# Altium PCB LMAT_AMT_V2.PcbDoc (part 2 of 2)
Units mil, origin at the board's own origin, x right, y up, seen from the top; angles counter-clockwise.
Board outline 1437.01 x 1604.33 mil, 2 copper layers (Top Layer, Bottom Layer), stack 62.192 mil thick; 98 components, 45 nets, 234 pads, 118 vias.
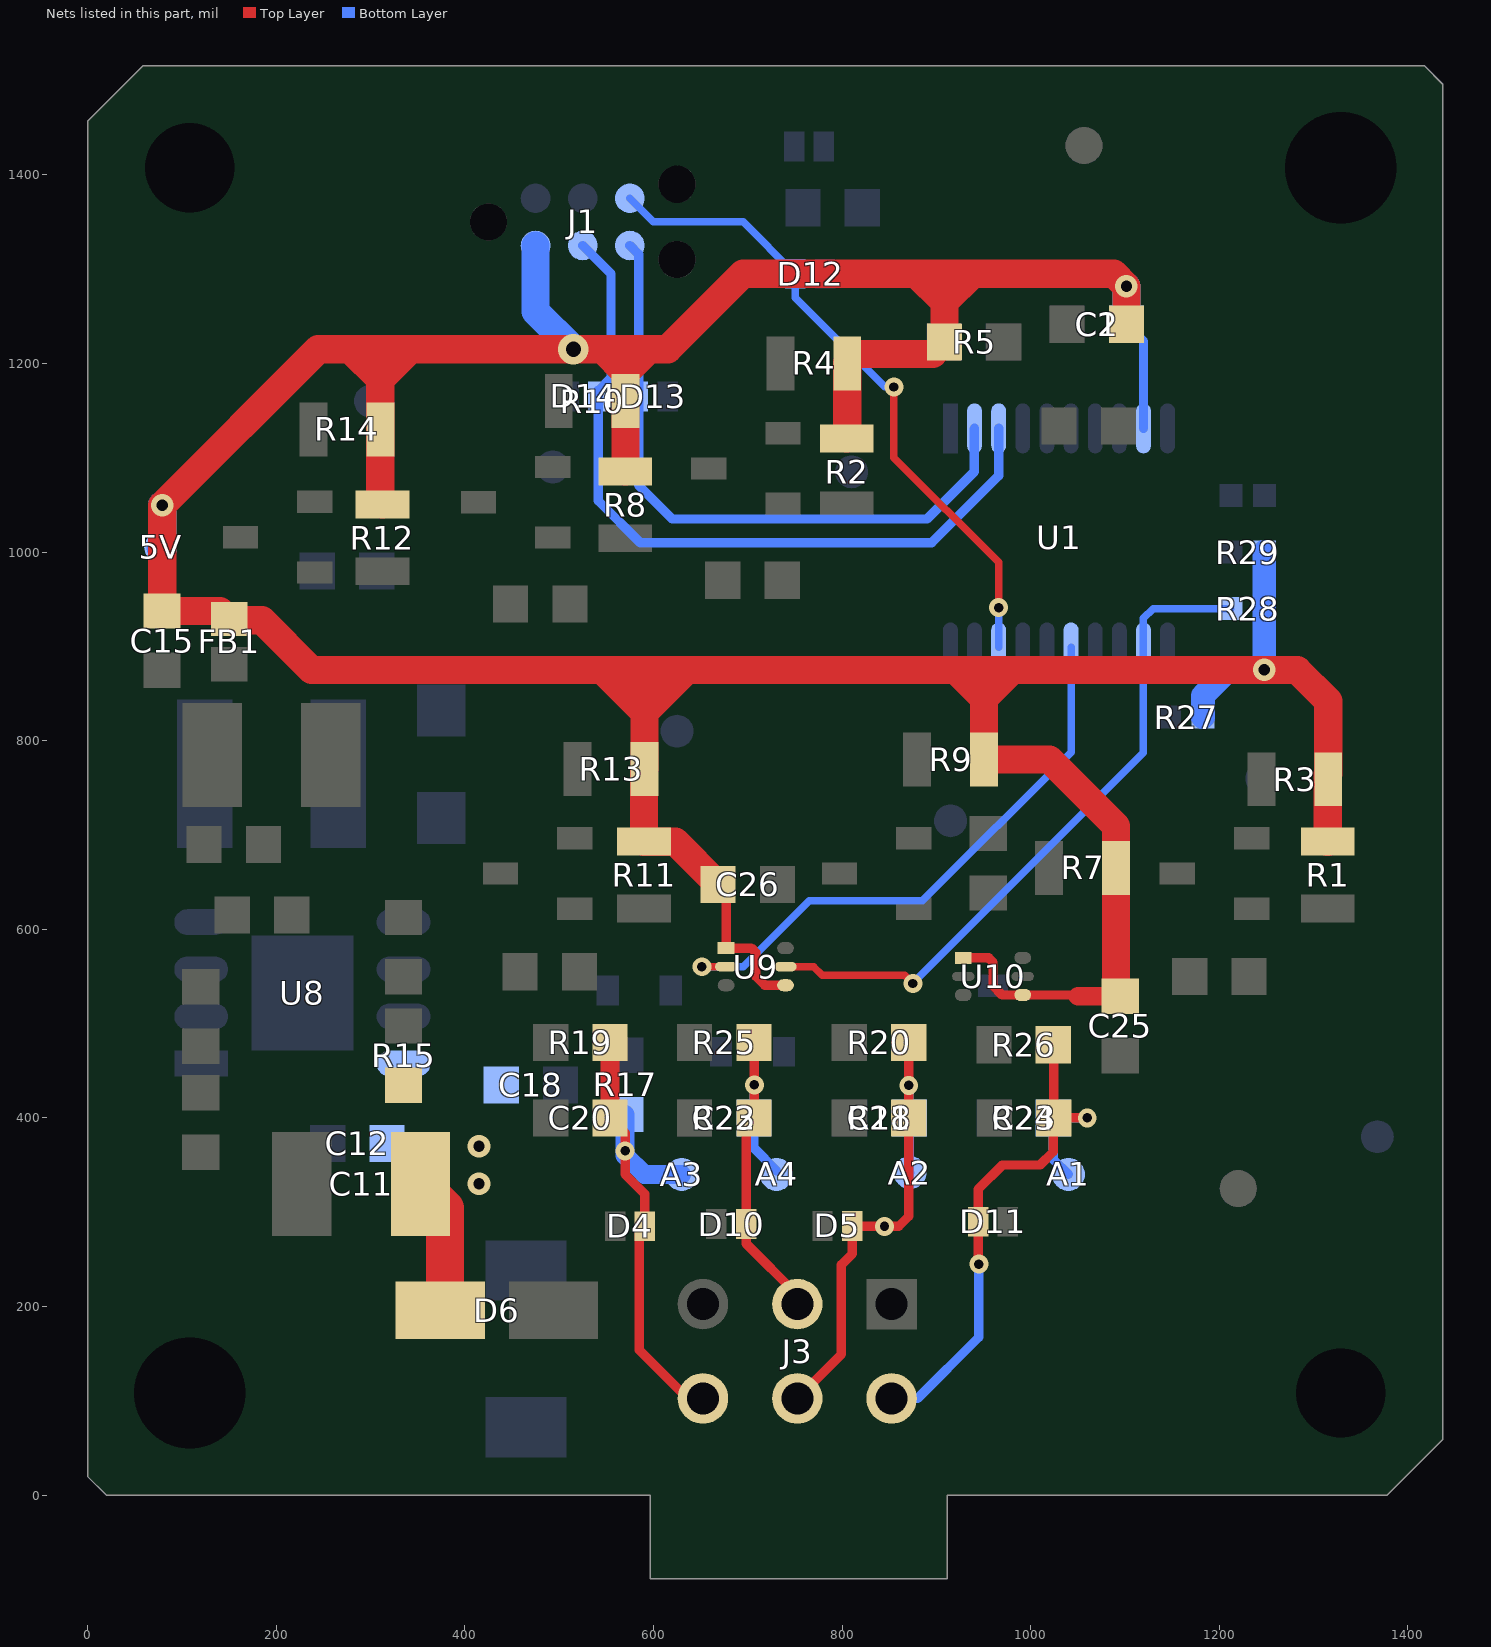
[diagram p2: the nets of this part, all layers, seen from the top]

## Via types
v1: diameter 20, hole 10, Top Layer to Bottom Layer, tented both sides, 66 vias
v2: diameter 24, hole 12, Top Layer to Bottom Layer, tented both sides, 49 vias
v3: diameter 32, hole 16, Top Layer to Bottom Layer, tented both sides, 3 vias

## Nets (pads, with @x,y where several pads share a name; then routed paths per layer and width w, separated by ;. In a path a pad name is that pad's centre, name@x,y a point inside that pad or via, vN(x,y) a via of type N, cw(c..) or ccw(c..) an arc to the next point about the centre after c; other vN are vias at no path point) (continued)
S3: R28.1 U1.12 U9.5 | length 727.8
  Top Layer w8: U9.5@740,560.31 769.69,560.31 779,551 866.5,551 v1(875,542.5)
  Bottom Layer w8: v1(875,542.5) 1119.57,787.07 U1.12@1119.57,898.86 1119.57,929.57 1130,940 R28.1@1212.28,940
S4: U1.15 U9.2 | length 622.5
  Top Layer w8: v1(651.31,560.31) U9.2@677.01,560.31
  Bottom Layer w8: v1(651.31,560.31) 695.31,560.31 765,630 885,630 1042.8,787.8 U1.15@1042.8,898.86
SIGNAL1: A1.1 C23.2 D11.2 J3.4 R24.2 R26.1 | length 625.1
  Top Layer w10: v1(945,245) 944.25,245.75 D11.2@944.25,290 944.25,324.25 970,350 1010,350 1024,364 1024,400 C23.2@1024.5,400 ; R26.1@1024,477.5 1024.5,477 C23.2@1024.5,400 ; v1(1060,400) C23.2@1024.5,400
  Bottom Layer w10: J3.4@852.5,102.5 880.09,102.5 945,167.41 v1(945,245) ; A1.1@1040,340 1024,356 R24.2@1024,400 v1(1060,400)
SIGNAL2: A2.1 C21.2 D5.2 J3.5 R18.2 R20.1 | length 547.3
  Top Layer w10: J3.5@752.5,102.5 799.27,149.27 799.27,244.27 810.75,255.75 810.75,285 v1(845,285) 860,285 870.75,295.75 870.75,399.95 C21.2@870.69,400 R20.1@870.69,479.2
  Bottom Layer w10: R18.2@870.75,399.95 v1(870.75,434.44) ; R18.2@871.5,400 871.5,342.5 A2.1@872,342
SIGNAL3: A3.1 C20.2 D4.2 J3.6 R17.2 R19.1 | length 544.3
  Top Layer w10: C20.2@554,400 570,384 v1(570,365) 570,340 590.75,319.25 D4.2@590.75,285 585,279.25 585,153.86 636.36,102.5 J3.6@652.5,102.5
  Top Layer w20: C20.2@554,400 R19.1@554,480
  Bottom Layer w20: R17.2@570,403.5 v1(570,365) 570,360 590,340 A3.1@630,340
SIGNAL4: A4.1 C22.2 D10.2 J3.2 R23.2 R25.1 | length 404.9
  Top Layer w10: R25.1@706.5,480 707,479.5 v1(707,435) 707,400.5 C22.2@706.5,400 698.25,391.75 D10.2@698.25,287.43 698.25,266.75 752.5,212.5 J3.2@752.5,202.5
  Bottom Layer w10: v1(707,435) 707,400.5 R23.2@706.5,400 706.5,367.96 A4.1@730.45,344
SWIM: D12.2 J1.5 U1.18 | length 699.9
  Top Layer w8: v1(855,1175) 855,1100 966.02,988.98 v1(966.02,941)
  Bottom Layer w8: J1.5@575,1375 600,1350 695,1350 750,1295 D12.2@750.45,1295 750.45,1269.55 845,1175 v1(855,1175) ; U1.18@966.02,898.86 v1(966.02,941)
UART_RX: D14.2 J1.4 U1.3 | length 811.4
  Bottom Layer w10: J1.4@525,1325 555,1295 555,1184.6 541.89,1171.5 541.5,1171.5 D14.2@541.5,1165 541.5,1054.26 585.76,1010 895,1010 966.02,1081.02 U1.3@966.02,1131.14
UART_TX: D13.2 J1.6 U1.2 | length 695.7
  Bottom Layer w10: J1.6@575,1325 584.25,1315.75 584.25,1070.75 620,1035 890,1035 940,1085 940,1130.71 U1.2@940.43,1131.14
VCC_5V: 5V.1 C1.1 C2.2 C15.1 C25.1 C26.1 FB1.2 J1.2 R1.1 R2.1 R3.1 R4.1 R5.2 R7.1 R8.1 R9.1 R10.1 R11.1 R12.1 R13.1 R14.1 R27.2 R28.2 R29.2 U1.9 U9.1 U9.4 U10.1 U10.4 | length 5364.8
  Top Layer w10: C26.1@668.5,647.5 677.01,639 U9.1@677.01,580 703.82,580 708.5,575.32 708.5,550.32 718.19,540.63 U9.4@740,540.63 ; U10.1@928.5,569.68 955.32,569.68 960,565 960,540 969.69,530.31 U10.4@991.5,530.31 1048.68,530.31 1050,529
  Top Layer w20: 1050,529 C25.1@1095,529
  Top Layer w30: 310,1215 278.36,1215 ; R12.1@312.5,1050.43 310.43,1052.5 R14.1@310.43,1130 310.43,1182.93 ; 545.86,1214.57 570.43,1190 ; R8.1@570,1085.43 570.43,1085.87 R10.1@570.43,1160 570.43,1190 ; R13.1@590,769.57 R11.1@590,692.93 623.07,692.93 C26.1@668.5,647.5 ; R13.1@590.43,770 590.43,830 ; R2.1@805,1120.43 805.43,1120.87 R4.1@805.43,1200 815.43,1210 896,1210 R5.2@908.5,1222.5 908.5,1265 ; C25.1@1093.68,530.31 1090.43,533.56 1090.43,709.57 1020,780 R9.1@950.43,780 950.43,845 ; C1.1@1101.5,1241.5 v2(1101.5,1281.64) 1088.13,1295 938.5,1295 ; R1.1@1315,692.93 1315,764.57 1315.43,765 1315.43,842.07 1282.5,875 980.43,875 ; 278.36,1215 244.5,1215 v2(79,1049.5) C15.1@79,937.5 140.13,937.5 150,927.63 184.87,927.63 237.5,875 545.43,875 ; 278.36,1215 310.43,1182.93 ; 310.43,1182.93 342.5,1215 ; 310.43,1182.93 310.43,1215 342.5,1215 ; 342.5,1215 v3(515,1215) 570.43,1215 ; 545.43,875 590.43,830 ; 545.43,875 590,875 ; 570.43,1190 570.43,1215 ; 570.43,1190 595,1214.57 595,1215 ; 570.43,1215 595,1215 ; 590,875 590.43,874.57 590.43,830 ; 590,875 635.43,875 ; 590.43,830 635.43,875 ; 595,1215 615,1215 695,1295 878.5,1295 ; 635.43,875 920.43,875 ; 878.5,1295 908.5,1265 ; 878.5,1295 908.5,1295 ; 908.5,1265 938.5,1295 ; 908.5,1265 908.5,1295 ; 908.5,1295 938.5,1295 ; 920.43,875 950.43,845 ; 920.43,875 950,875 ; 950,875 950.43,874.57 950.43,845 ; 950,875 980.43,875 ; 950.43,845 980.43,875
  Bottom Layer w10: C2.2@1101.5,1241.5 1119.57,1223.43 U1.9@1119.57,1131.14
  Bottom Layer w25: R27.2@1182.72,825 1182.72,847.72 1210,875 v2(1247.72,875) R28.2@1247.72,940 R29.2@1247.72,1000
  Bottom Layer w30: 5V.1@77.5,1005 79,1006.5 v2(79,1049.5) ; J1.2@475,1325 475,1255 v3(515,1215) ; C2.2@1101.5,1241.5 v2(1101.5,1281.64)
VCC_IN: C11.2 C12.1 C18.1 D6.1 R15.2 U8.8 | length 144.8
  Top Layer w40: C11.2@352.99,330 378.96,304.03 D6.1@378.96,196
  other v2: 415,330 415,370
pads on no net: FID1.0 FID2.0 FID3.0 FID4.0 J1.0 U1.5 U1.6

## Polygon pours and split planes (outlines as drawn)
VCC_IN on Top Layer "VCC_IN_L01_P071" (solid, remove dead copper, pour order 71): 320.32,244.61 413.49,244.61 430,261.12 430,460 420,470 311.46,470 295,453.55 295,261.78
GND on Top Layer "GND_L01_P072" (solid, remove dead copper, pour order 72): 19.68,0 1377.95,0 1437.01,59.05 1437.01,1496.06 1417.32,1515.75 59.06,1515.75 0,1456.69 0,19.69 0,19.68
VCC_IN on Bottom Layer "VCC_IN_L02_P070" (solid, remove dead copper, pour order 70): 434.7,384.7 460,410 460,465.11 438.81,486.31 434.7,486.31 336.31,486.31 306,456 306,319.02 344.82,280.16 420.1,280.1 434.7,294.69
GND on Bottom Layer "GND_L02_P073" (solid, remove dead copper, pour order 73): 1377.95,0 1437.01,59.06 1437.01,1496.06 1417.32,1515.75 59.06,1515.75 0,1456.69 0,19.68 19.68,0

## Keep-outs
Keep-Out Layer:
  lines w5: 0,222.5 cw(c108.21,108.21) 222.5,0 ; 0,1293 ccw(c108.27,1407.48) 222.39,1516.12 ; 1214.27,1515.75 ccw(c1328.52,1407.26) 1437,1293 ; 1215,0 cw(c1328.54,108.72) 1437.01,222.5 ; 59.06,1515.75 1417.32,1515.75 1437.01,1496.06 1437.01,59.05 1377.95,0 911.42,0 911.42,-88.58 596.46,-88.58 596.46,0 19.68,0 0,19.68 0,1456.69 59.06,1515.75 ; 59.06,1515.75 59.06,1515.75
  text "'.Layer_Name'" at 15860,-9491 h150

## Other copper
Top Layer:
  pour cut-out: 495.95,674.69 495.95,640.82 499.54,644.4 516.05,644.4 516.05,673.95 515,675
  pour cut-out: 210.95,1029.69 210.95,995.82 214.54,999.4 231.05,999.4 231.05,1028.95 230,1030
  pour cut-out: 465.95,1069.69 465.95,1035.82 469.54,1039.4 486.05,1039.4 486.05,1068.95 485,1070
  pour cut-out: 160,643.84 174.87,643.84 174.87,660.96 160,660.96
  pour cut-out: 337.5,949.51 337.5,910 327.5,910 327.5,949.51
  pour cut-out: 628.37,614.78 628.37,623.13 648.63,623.13 648.63,614.78
  pour cut-out: 511.22,827.37 502.87,827.37 502.87,847.63 511.22,847.63
  pour cut-out: 1040.32,702.44 1034.42,708.34 1041.83,715.74 1047.73,709.84
  pour cut-out: 850.39,810.61 850.39,847.65 860.87,847.65 860.87,810.61
  pour cut-out: 845.78,1073.47 867.54,1073.47 867.54,1063 845.78,1063
  pour cut-out: 1002.43,1238.38 1002.43,1246.72 1021.52,1246.72 1021.52,1238.38
  pour cut-out: 1206.4,677.06 1223.7,677.06 1223.03,676.39 1223.03,641.72 1206.13,641.72
  text "'.Layer_Name'" at 15625,-9501 h150
Bottom Layer:
  pour cut-out: 939.57,516.89 922.52,516.89 922.52,524.33 928.5,530.31 928.66,530.16 944.25,530.16
  pour cut-out: 569.2,564.88 600.8,564.88 600.8,555.8 600,555 570,555
  pour cut-out: 727.97,1075.69 727.97,1056.79 726.18,1055 745,1055 745,1075
  pour cut-out: 927.72,1169.9 925,1172.62 925,1191.39 940,1191.39 940,1168.61
  pour cut-out: 320,650.29 320,680 313.44,680 314.47,655.9
  pour cut-out: 722.46,1247.5 715,1247.5 715,1230.77 722.46,1230.77
  pour cut-out: 414.97,564.88 414.97,516.14 415.11,516 401,516 401,565
  pour cut-out: 550,1051.76 550,1010.63 565,1010.63 565,1050.88
  text "'.Layer_Name'" at 15750,-9501 h150

## Silkscreen, mask and mechanical layers (free items; w line width, h text height)
Top Overlay:
  text "LMAT_AMT_V2" at 662,1332 h80
  text "'.Layer_Name'" at 15755,-9491 h150
Bottom Overlay:
  text "'.Layer_Name'" at 15795,-9476 h150
Top Paste:
  text "'.Layer_Name'" at 15940,-9481 h150
Bottom Paste:
  text "'.Layer_Name'" at 15940,-9501 h150
Top Solder:
  region: 985,275 985,305 935,305 935,275
  region: 770,300.43 770,270.43 820,270.43 820,300.43
  region: 657.5,302.43 657.5,272.43 707.5,272.43 707.5,302.43
  region: 550,300 550,270 600,270 600,300
  rectangle: 725,532 754,589
  rectangle: 664.16,532 690,589
  rectangle: 913.5,521.68 942.5,578.68
  rectangle: 976.5,521.68 1005.5,578.68
  text "'.Layer_Name'" at 16030,-9481 h150
Bottom solder:
  region: 625,1148 625,1183 575,1183 575,1148
  region: 549.57,1148 549.57,1182 499.57,1182 499.57,1148
  region: 790,1415 790,1445 740,1445 740,1415
  region: 790,1280 790,1310 740,1310 740,1280
Drill Guide:
  text "'.Layer_Name'" at 16070,-9496 h150
Fabrication Notes:
  drawing of 191 lines, arcs and shapes, not listed
  text "Layer" at 4869.5,5696.5 h60
  text "Name" at 5279.41,5696.5 h60
  text "Material" at 6209.16,5696.5 h60
  text "Thickness" at 7068.92,5696.5 h60
  text "Constant" at 7718.76,5696.5 h60
  text "Board Layer Stack" at 8288.62,5696.5 h60
  text "1" at 4869.5,5576.5 h60
  text "Top Overlay" at 5279.41,5576.5 h60
  text "2" at 4869.5,5456.5 h60
  text "Top Solder" at 5279.41,5456.5 h60
  text "Solder Resist" at 6209.16,5456.5 h60
  text "0.40mil" at 7068.92,5456.5 h60
  text "3.5" at 7718.76,5456.5 h60
  text "3" at 4869.5,5336.5 h60
  text "Top Layer" at 5279.41,5336.5 h60
  text "Copper" at 6209.16,5336.5 h60
  text "1.40mil" at 7068.92,5336.5 h60
  text "4" at 4869.5,5216.5 h60
  text "Dielectric 1" at 5279.41,5216.5 h60
  text "FR-4" at 6209.16,5216.5 h60
  text "59.39mil" at 7068.92,5216.5 h60
  text "4.2" at 7718.76,5216.5 h60
  text "5" at 4869.5,5096.5 h60
  text "Bottom Layer" at 5279.41,5096.5 h60
  text "Copper" at 6209.16,5096.5 h60
  text "1.40mil" at 7068.92,5096.5 h60
  text "6" at 4869.5,4976.5 h60
  text "Bottom solder" at 5279.41,4976.5 h60
  text "Solder Resist" at 6209.16,4976.5 h60
  text "0.40mil" at 7068.92,4976.5 h60
  text "3.5" at 7718.76,4976.5 h60
  text "7" at 4869.5,4856.5 h60
  text "Bottom Overlay" at 5279.41,4856.5 h60
  text "Total Pcb Thickness = 1.6MM +/- 10%" at 5255.55,4296.24 h100
  text "Finished cu Thickness: 1 OZ" at 5656.3,4045.3 h100
  text "FABRICATION NOTES:" at -10970.2,697.07 h80
  text "1. LATEST VERSION OF ALL REFERENCED IPC SPECIFICATIONS TO BE USED." at -10970.2,497.07 h70
  text "2. ALL MULTILAYER PC BOARDS MUST BE PRODUCED IN ACCORDANCE IPC-A-600, CLASS 2." at -10970.2,297.14 h70
  text "3. INSPECT ALL MULTILAYER PC BOARDS IN ACCORDANCE WITH IPC-6012, CLASS 2." at -10970.2,97.14 h70
  text "4. MATERIAL:  THIN LAMINATE, FR4 COPPER CLAD 1 OZ PER LAYER (EXTERNAL LAYERS)" at -10970.2,-102.86 h70
  text "1.6 MM +/-10% THICK, COLOR GREEN," at -10772.2,-237.93 h70
  text "MINIMUM CTI (PER IEC 60112 USING SOLUTION A) = 175." at -10772.2,-387.93 h70
  text "5. FABRICATE BOARDS USING THE GERBER FILES CONTAINED IN FABRICATION FOLDER." at -10970.2,-602.86 h70
  text "6. DRILL DATA ARE CONTAINED IN THE FABRICATION FOLDER." at -10970.2,-812.86 h70
  text "7. ALL HOLE DIAMETERS MUST BE PER DRILL CHART +/-0.003 INCHES TOLERANCE," at -10970.2,-1017.86 h70
  text "UNLESS OTHERWISE SPECIFIED." at -10770.2,-1164.93 h70
  text "8. PLATED-THRU HOLES TO HAVE COPPER WALL THICKNESS NOT LESS THAN 0.001 INCHES." at -10970.2,-1367.86 h70
  text "THICKNESS TO BE DETERMINED BY IPC-6012, CLASS 2." at -10790.2,-1512.93 h70
  text "9. SURFACE FINISH PROCESS MUST BE HAL LEAD-FREE" at -10970.2,-1717.86 h70
  text "10. SILKSCREEN BOTH SIDES WITH WHITE EPOXY NON-CONDUCTIVE INK." at -10970.2,-1892.93 h70
  text "SILKSCREEN MAY BE TRIMMED OFF ANY SOLDERED ENTITY." at -10714.2,-2042.93 h70
  text "11. SOLDER MASK BOTH SIDES WITH LIQUID PHOTO IMAGEABLE SOLDER MASK (LPI)," at -10970.2,-2242.93 h70
  text "MEETING IPC-SM-840, CLASS 2, HIGH PERFORMANCE SPECIFICATIONS." at -10720.2,-2380.93 h70
  text "FINISH: SOLDER MASK OVER BARE COPPER (SMOBC)." at -10720.2,-2535.93 h70
  text "12. WARP AND TWIST SHALL BE LESS THAN 0.0075 INCH PER INCH." at -10970.2,-2752.93 h70
  text "INSPECT PER IPC-TM-650, 2.4.22." at -10714.2,-2894.93 h70
  text "13. ALL BOARDS MUST BE DATE CODED USING A FOUR DIGIT CODE," at -10970.2,-3087.93 h70
  text "YEAR FOLLOWED BY WEEK (e.g. 0449 = 49TH WEEK OF 2004)." at -10714.2,-3229.93 h70
  text "14. ALL DIMENSIONS AND HOLE DIAMETERS APPLY TO THE FINISHED BOARD." at -10970.2,-3442.93 h70
  text "15. PADS MUST BE FINISHED TO WITHIN +/-0.0015 INCHES OF THE MINOR DIMENSION (PAD WIDTH)" at -10970.2,-3637.93 h70
  text "AND +/-0.002 INCHES OF THE MAJOR DIMENSION (PAD LENGTH)." at -10711.2,-3789.93 h70
  text "16. FIDUCIALS MUST BE FREE OF ANY MARKINGS." at -10970.2,-3972.93 h70
  text "17. BARE BOARD TO BE ELECTRICALLY TESTED IN ACCORDANCE WITH IPC-ET-652 AND MARKED AS TESTED." at -10970.2,-4177.93 h70
  text "18. BOARDS SHALL BE UL-RECOGNIZED AND UL-MARKED. UL FIRE RETARDANT RATING 94V-0 OR HIGHER." at -10970.2,-4377.93 h70
  text "19. ROHS: ALL MATERIALS MUST BE COMPLIANT WITH THE ROHS DIRECTIVE." at -10970.2,-4577.93 h70
  text "20. EACH PCB MUST BE INDIVIDUALLY BAGGED." at -10995,-4790 h70
  text "'.Layer_Name'" at 15655,-9501 h150
Board Outlines:
  the board outline again, w5
Bottom Component Outlines:
  lines w5: -13895.07,-5183.7 -13595.07,-5183.7 ; -13895.07,-183.7 -13595.07,-183.7 ; -13895.07,4816.3 -13595.07,4816.3 ; -9895.07,-10183.7 -9895.07,-9883.7 ; -9895.07,9516.3 -9895.07,9816.3 ; -5895.07,-10183.7 -5895.07,-9883.7 ; -5895.07,9516.3 -5895.07,9816.3 ; -1895.07,-10183.7 -1895.07,-9883.7 ; -1895.07,9516.3 -1895.07,9816.3 ; 2104.93,-10183.7 2104.93,-9883.7 ; 2104.93,9516.3 2104.93,9816.3 ; 6104.93,-10183.7 6104.93,-9883.7 ; 6104.93,9516.3 6104.93,9816.3 ; 10104.93,-10183.7 10104.93,-9883.7 ; 10104.93,9516.3 10104.93,9816.3 ; 11904.93,-9883.7 13304.93,-9883.7 17804.93,-9883.7 ; 14104.93,-10183.7 14104.93,-9883.7 ; 14104.93,9516.3 14104.93,9816.3 ; 17804.93,-8683.7 17804.93,-9883.7 ; 17804.93,-5183.7 18104.93,-5183.7 ; 17804.93,-183.7 18104.93,-183.7 ; 17804.93,4816.3 18104.93,4816.3 ; 17804.93,-9883.7 17804.93,9516.3 -13595.07,9516.3 -13595.07,-9883.7 17804.93,-9883.7 ; -13895.07,-10183.7 -13895.07,9816.3 18104.93,9816.3 18104.93,-10183.7 -13895.07,-10183.7
  lines w10: 10500.93,-9879.8 11800.93,-9879.8 17800.93,-9879.8 17800.93,-8379.8 ; 10500.93,-8010.15 17795.93,-8010.15 ; 11800.93,-9579.8 14200.93,-9579.8 17800.93,-9579.8 ; 11800.93,-9279.8 14200.93,-9279.8 17795.65,-9279.8 ; 11800.93,-8979.8 14200.93,-8979.8 17800.93,-8979.8 ; 11800.93,-8679.8 14200.93,-8679.8 ; 12800.93,-9879.8 12800.93,-9579.8 ; 13200.93,-9279.8 13200.93,-8379.8 ; 14200.93,-9879.8 14200.93,-8379.8 ; 15100.93,-9879.8 15100.93,-9579.8 ; 15500.93,-9879.8 15500.93,-9579.8 ; 17400.93,-9879.8 17400.93,-9579.8 ; 10500.93,-8379.8 11800.93,-8379.8 ; 10500.93,-8379.8 10500.93,-9881.7 11800.93,-9881.7 11800.93,-8379.8 ; 10500.93,-8379.8 10500.93,-7600.15 17800.93,-7600.15 17800.93,-8379.8 ; 11800.93,-8379.8 17800.93,-8379.8
  text "1" at -11913.07,9626.3 h70
  text "2" at -7918.07,9626.3 h70
  text "3" at -3923.07,9626.3 h70
  text "4" at 77.94,9626.3 h70
  text "5" at 4076.27,9626.3 h70
  text "6" at 8074.61,9626.3 h70
  text "7" at 12076.27,9626.3 h70
  text "8" at 16071.27,9626.3 h70
  text "A" at -13770.07,7228.3 h70
  text "A" at 17929.93,7228.3 h70
  text "B" at -13770.07,2228.3 h70
  text "B" at 17929.93,2228.3 h70
  text "C" at -13770.07,-2771.7 h70
  text "C" at 17929.93,-2771.7 h70
  text "D" at -13770.07,-7771.7 h70
  text "D" at 17929.93,-7771.7 h70
  text "THE INFORMATION CONTAINED IN THIS DOCUMENT IS PROPRIETARY OF CUSTOMER." at 17641.19,-7784.52 h75
  text "ANY PRODUCTION IN PART OR WHOLE WITHOUT PRIOR WRITTEN AUTHORIZATION OF CUSTOMER IS PROHIBITED." at 17649.33,-7938.02 h75
  text "CUSTOMER:  LUMAX" at 16081.33,-8251.02 h100
  text "DATE" at 14105.93,-8484.8 h45
  text "Drawn By: Harshavardhan K" at 13115.93,-8489.8 h45
  text "UNLESS OTHERWISE" at 11756.33,-8561.02 h70
  text "Design Partner:" at 17615.93,-8610.8 h100
  text "'.Print_Date'" at 14120.93,-8634.8 h70
  text "SPECIFIED:" at 11730.93,-8669.8 h70
  text "DATE" at 14110.93,-8784.8 h45
  text "ALL DIMENSIONS ARE" at 11766.33,-8796.02 h70
  text "Designed By : Vijendra N" at 13113.93,-8799.8 h45
  text "EmbDes Technologies Pvt. Ltd." at 17615.93,-8829.52 h100
  text "'.Print_Date'" at 14120.93,-8934.8 h70
  text "IN INCHES" at 11708.93,-8937.8 h70
  text "DATE" at 14120.93,-9074.8 h45
  text "Checked By : Uday Kumar K" at 13113.93,-9079.8 h45
  text "TOLERANCES" at 11658.93,-9087.8 h70
  text "PROJECT NAME:    LMAT_AMT_V2" at 17615.93,-9177.02 h80
  text "(DECIMAL):" at 11708.93,-9187.8 h70
  text "'.Print_Date'" at 14120.93,-9224.8 h70
  text ".X +/-0.1" at 11708.93,-9337.8 h70
  text "REF ID" at 14123.93,-9396.02 h45
  text ".XX +/-0.01" at 11701.33,-9446.02 h70
  text "'.Layer_Name'" at 15045,-9476 h150
  text "LAYER NAME:" at 17615.93,-9486.02 h80
  text "ASSY BOTTOM" at 16642.99,-9524.07 h150
  text ".XXX +/-0.005" at 11696.33,-9556.02 h70
  text "Scale" at 12711.33,-9681.02 h45
  text "Size" at 15385.93,-9684.8 h45
  text "REV" at 17685.93,-9684.8 h45
  text "ANGLES +/-0.5" at 11558.93,-9687.8 h70
  text "Sheet     of" at 14955.93,-9689.8 h45
  text "DWG NO" at 17336.33,-9691.02 h45
  text "DO NOT SCALE" at 14036.33,-9716.02 h70
  text "1:1" at 12385.93,-9784.8 h70
  text "1" at 14497.93,-9799.8 h70
  text "1" at 14891.33,-9801.02 h70
  text "D" at 15309.93,-9808.7 h90
  text "1.0" at 17690.93,-9809.8 h70
  text "DRAWING" at 14036.33,-9841.02 h70
  text "1" at -11913.07,-10068.7 h70
  text "2" at -7918.07,-10068.7 h70
  text "3" at -3923.07,-10068.7 h70
  text "4" at 77.94,-10068.7 h70
  text "5" at 4076.27,-10068.7 h70
  text "6" at 8074.61,-10068.7 h70
  text "7" at 12076.27,-10068.7 h70
  text "8" at 16071.27,-10068.7 h70
Dimensions:
  lines w5: 59.06,1515.75 59.06,1515.75 ; 59.06,1515.75 0,1456.69 0,19.68 19.68,0 596.46,0 596.46,-88.58 911.42,-88.58 911.42,0 1377.95,0 1437.01,59.05 1437.01,1496.06 1417.32,1515.75 59.06,1515.75
  lines w8: 0,-50 0,7.18
  text "'.Layer_Name'" at 15695,-9486 h150
Assembly Notes:
  text "ASSEMBLY NOTES:" at -11451.14,5359.58 h80
  text "CAUTION :" at -11457.14,5212.99 h80
  text "COMPONENTS ARE SUBJECT TO DAMAGE BY STATIC ELECTRICITY." at -10855.14,5204.99 h80
  text "1. SERIALIZATION PER #900-984." at -10871.14,5053.99 h80
  text "2.  REFER BOM FOR COMPONENT PLACEMENT." at -10889.14,4868.99 h80
  text "3. MARK WITH SERIAL NUMBER ON A STICKER PASTED." at -10892.14,4679.99 h80
  text "4.  LABELS SHALL NOT TO BE PLACED OVER EXPOSED COPPER." at -10886.14,4493.33 h80
  text "5. MANUFACTURE PER TS 16469 STANDARD." at -10881.14,4326.99 h80
  text "6. BOARD MUST BE CLEANED EVEN IF USING NO CLEAN FLUX." at -10881.14,4161.99 h80
  text "7.  ASSEMBLY SHALL BE ELECTRICALLY TESTED." at -10876.14,3996.99 h80
  text "8.  SOLDER AND ASSEMBLE AS PER INDUSTRY WORKMANSHIP STANDARDS." at -10876.14,3826.99 h80
  text "9. ASSEMBLY MUST BE ROHS COMPLIANT." at -10886.14,3661.99 h80
Bottom Assembly:
  text "'.Layer_Name'" at 15655,-9486 h40
Top Component Outlines:
  lines w5: -13860.39,-5193.39 -13560.39,-5193.39 ; -13860.39,-193.39 -13560.39,-193.39 ; -13860.39,4806.61 -13560.39,4806.61 ; -9860.39,-10193.39 -9860.39,-9893.39 ; -9860.39,9506.61 -9860.39,9806.61 ; -5860.39,-10193.39 -5860.39,-9893.39 ; -5860.39,9506.61 -5860.39,9806.61 ; -1860.39,-10193.39 -1860.39,-9893.39 ; -1860.39,9506.61 -1860.39,9806.61 ; 2139.61,-10193.39 2139.61,-9893.39 ; 2139.61,9506.61 2139.61,9806.61 ; 6139.61,-10193.39 6139.61,-9893.39 ; 6139.61,9506.61 6139.61,9806.61 ; 10139.61,-10193.39 10139.61,-9893.39 ; 10139.61,9506.61 10139.61,9806.61 ; 11939.61,-9893.39 13339.61,-9893.39 17839.61,-9893.39 ; 14139.61,-10193.39 14139.61,-9893.39 ; 14139.61,9506.61 14139.61,9806.61 ; 17839.61,-8693.39 17839.61,-9893.39 ; 17839.61,-5193.39 18139.61,-5193.39 ; 17839.61,-193.39 18139.61,-193.39 ; 17839.61,4806.61 18139.61,4806.61 ; 17839.61,-9893.39 17839.61,9506.61 -13560.39,9506.61 -13560.39,-9893.39 17839.61,-9893.39 ; -13860.39,-10193.39 -13860.39,9806.61 18139.61,9806.61 18139.61,-10193.39 -13860.39,-10193.39
  lines w10: 10534.51,-9891.39 11834.51,-9891.39 ; 10534.51,-8021.73 17829.51,-8021.73 ; 11829.51,-9891.39 10534.91,-9891.39 10534.51,-9890.98 10534.51,-8391.39 ; 11834.51,-9591.39 14234.51,-9591.39 17834.51,-9591.39 ; 11834.51,-9291.39 14234.51,-9291.39 17829.23,-9291.39 ; 11834.51,-8991.39 14234.51,-8991.39 17834.51,-8991.39 ; 11834.51,-8691.39 14234.51,-8691.39 ; 12834.51,-9891.39 12834.51,-9591.39 ; 13234.51,-9291.39 13234.51,-8391.39 ; 14234.51,-9891.39 14234.51,-8391.39 ; 15134.51,-9891.39 15134.51,-9591.39 ; 15534.51,-9891.39 15534.51,-9591.39 ; 17434.51,-9891.39 17434.51,-9591.39 ; 10534.51,-8391.39 11834.51,-8391.39 ; 10534.51,-8391.39 10534.51,-7611.73 17834.51,-7611.73 17834.51,-8391.39 ; 11834.51,-9891.39 11834.51,-8391.39 ; 11834.51,-9891.39 17834.51,-9891.39 17834.51,-8391.39 ; 11834.51,-8391.39 17834.51,-8391.39
  text "1" at -11878.39,9616.61 h70
  text "2" at -7883.39,9616.61 h70
  text "3" at -3888.39,9616.61 h70
  text "4" at 112.62,9616.61 h70
  text "5" at 4110.96,9616.61 h70
  text "6" at 8109.29,9616.61 h70
  text "7" at 12110.96,9616.61 h70
  text "8" at 16105.96,9616.61 h70
  text "A" at -13735.39,7218.61 h70
  text "A" at 17964.61,7218.61 h70
  text "B" at -13735.39,2218.61 h70
  text "B" at 17964.61,2218.61 h70
  text "C" at -13735.39,-2781.39 h70
  text "C" at 17964.61,-2781.39 h70
  text "THE INFORMATION CONTAINED IN THIS DOCUMENT IS PROPRIETARY OF CUSTOMER." at 10579.77,-7776.1 h75
  text "D" at -13735.39,-7781.39 h70
  text "D" at 17964.61,-7781.39 h70
  text "ANY PRODUCTION IN PART OR WHOLE WITHOUT PRIOR WRITTEN AUTHORIZATION OF CUSTOMER IS PROHIBITED." at 10587.91,-7929.6 h75
  text "CUSTOMER:  LUMAX" at 12426.77,-8241.1 h100
  text "Drawn By : Harshavardhan K" at 11934.51,-8491.39 h45
  text "DATE" at 13334.51,-8491.39 h45
  text "UNLESS OTHERWISE" at 10634.51,-8591.39 h70
  text "Design Partner:" at 14324.51,-8596.1 h100
  text "'.Print_Date'" at 13334.51,-8641.39 h70
  text "SPECIFIED:" at 10884.51,-8691.39 h70
  text "Designed By : Vijendra N" at 11916.51,-8791.39 h45
  text "DATE" at 13334.51,-8791.39 h45
  text "EmbDes Technologies Pvt. Ltd." at 14324.51,-8813.39 h100
  text "ALL DIMENSIONS ARE" at 10584.51,-8841.39 h70
  text "'.Print_Date'" at 13334.51,-8941.39 h70
  text "IN INCHES" at 10862.51,-8959.39 h70
  text "Checked By : Uday Kumar K" at 11916.51,-9091.39 h45
  text "DATE" at 13334.51,-9091.39 h45
  text "TOLERANCES" at 10812.51,-9109.39 h70
  text "PROJECT NAME:    LMAT_AMT_V2" at 14324.51,-9188.6 h80
  text "(DECIMAL):" at 10862.51,-9209.39 h70
  text "'.Print_Date'" at 13334.51,-9241.39 h70
  text ".X +/-0.1" at 10862.51,-9359.39 h70
  text "REF ID" at 11934.51,-9391.39 h45
  text ".XX +/-0.01" at 10812.51,-9459.39 h70
  text "LAYER NAME:" at 14324.51,-9478.6 h80
  text "ASSY TOP" at 15519.91,-9544.18 h150
  text ".XXX +/-0.005" at 10712.51,-9559.39 h70
  text "Scale" at 11934.51,-9691.39 h45
  text "Sheet     of" at 14334.51,-9691.39 h45
  text "Size" at 15234.51,-9691.39 h45
  text "DWG NO" at 15634.51,-9691.39 h45
  text "REV" at 17534.51,-9691.39 h45
  text "ANGLES +/-0.5" at 10712.51,-9709.39 h70
  text "DO NOT SCALE" at 13084.51,-9741.39 h70
  text "1:1" at 12234.51,-9791.39 h70
  text "1" at 14434.51,-9811.39 h70
  text "1" at 14934.51,-9816.39 h70
  text "D" at 15284.51,-9816.39 h90
  text "1.0" at 17539.51,-9816.39 h70
  text "DRAWING" at 13234.51,-9841.39 h70
  text "1" at -11878.39,-10078.39 h70
  text "2" at -7883.39,-10078.39 h70
  text "3" at -3888.39,-10078.39 h70
  text "4" at 112.62,-10078.39 h70
  text "5" at 4110.96,-10078.39 h70
  text "6" at 8109.29,-10078.39 h70
  text "7" at 12110.96,-10078.39 h70
  text "8" at 16105.96,-10078.39 h70
Drill Drawing:
  circle w10: c-4008.38,5539.83 r33.33
  lines w10: -4041.71,4923.17 -4025.04,4923.17 -4008.38,4906.5 -3991.71,4923.17 -3975.04,4923.17 -3991.71,4939.83 -3975.04,4956.5 -3991.71,4956.5 -4008.38,4973.17 -4025.04,4956.5 -4041.71,4956.5 -4025.04,4939.83 -4041.71,4923.17 ; -4041.71,5056.5 -4008.38,5073.17 -3975.04,5056.5 -3991.71,5089.83 -3975.04,5123.17 -4008.38,5106.5 -4041.71,5123.17 -4025.04,5089.83 -4041.71,5056.5 ; -4041.71,5223.17 -4025.04,5223.17 -4025.04,5206.5 -3991.71,5206.5 -3991.71,5223.17 -3975.04,5223.17 -3975.04,5256.5 -3991.71,5256.5 -3991.71,5273.17 -4025.04,5273.17 -4025.04,5256.5 -4041.71,5256.5 -4041.71,5223.17 ; -4041.71,5356.5 -4041.71,5373.17 -4025.04,5389.83 -4041.71,5406.5 -4041.71,5423.17 -4025.04,5423.17 -4008.38,5406.5 -3991.71,5423.17 -3975.04,5423.17 -3975.04,5406.5 -3991.71,5389.83 -3975.04,5373.17 -3975.04,5356.5 -3991.71,5356.5 -4008.38,5373.17 -4025.04,5356.5 -4041.71,5356.5 ; -4041.71,5723.17 -3975.04,5723.17 -4008.38,5656.5 -4041.71,5723.17 ; -4041.71,5806.5 -3975.04,5806.5 -3975.04,5873.17 -4041.71,5873.17 -4041.71,5806.5
  lines w15: -4101.5,4861.5 3008.57,4861.5 ; -4101.5,5911.5 3008.57,5911.5 ; -3550.62,4711.5 -3550.62,6061.5 ; -2970.78,4711.5 -2970.78,6061.5 ; -1851.1,4711.5 -1851.1,6061.5 ; -1345.23,4711.5 -1345.23,6061.5 ; -611.43,4711.5 -611.43,6061.5 ; 888.12,4711.5 888.12,6061.5 ; 1477.97,4711.5 1477.97,6061.5 ; 2223.77,4711.5 2223.77,6061.5 ; -4101.5,4711.5 3008.57,4711.5 3008.57,6061.5 -4101.5,6061.5 -4101.5,4711.5
  text "Symbol" at -4011.5,5956.5 h72
  text "Count" at -3505.62,5956.5 h72
  text "Hole Size" at -2925.78,5956.5 h72
  text "Plated" at -1806.1,5956.5 h72
  text "Hole Type" at -1300.23,5956.5 h72
  text "Drill Layer Pair" at -566.43,5956.5 h72
  text "Via/Pad" at 933.12,5956.5 h72
  text "Pad Shape" at 1522.97,5956.5 h72
  text "Template" at 2268.77,5956.5 h72
  text "2" at -3505.62,5806.5 h60
  text "2.400mm (94.49mil)" at -2925.78,5806.5 h60
  text "NPTH" at -1806.1,5806.5 h60
  text "Round" at -1300.23,5806.5 h60
  text "Top Layer - Bottom Layer" at -566.43,5806.5 h60
  text "Pad" at 933.12,5806.5 h60
  text "Rounded" at 1522.97,5806.5 h60
  text "c10hn240" at 2268.77,5806.5 h60
  text "2" at -3505.62,5656.5 h60
  text "3.000mm (118.11mil)" at -2925.78,5656.5 h60
  text "NPTH" at -1806.1,5656.5 h60
  text "Round" at -1300.23,5656.5 h60
  text "Top Layer - Bottom Layer" at -566.43,5656.5 h60
  text "Pad" at 933.12,5656.5 h60
  text "Rounded" at 1522.97,5656.5 h60
  text "c10hn300" at 2268.77,5656.5 h60
  text "3" at -3505.62,5506.5 h60
  text "0.406mm (16.00mil)" at -2925.78,5506.5 h60
  text "PTH" at -1806.1,5506.5 h60
  text "Round" at -1300.23,5506.5 h60
  text "Top Layer - Bottom Layer" at -566.43,5506.5 h60
  text "Via" at 933.12,5506.5 h60
  text "Rounded" at 1522.97,5506.5 h60
  text "v81h41m0mx0" at 2268.77,5506.5 h60
  text "3" at -3505.62,5356.5 h60
  text "1.000mm (39.37mil)" at -2925.78,5356.5 h60
  text "NPTH" at -1806.1,5356.5 h60
  text "Round" at -1300.23,5356.5 h60
  text "Top Layer - Bottom Layer" at -566.43,5356.5 h60
  text "Pad" at 933.12,5356.5 h60
  text "Rounded" at 1522.97,5356.5 h60
  text "c100hn100" at 2268.77,5356.5 h60
  text "6" at -3505.62,5206.5 h60
  text "0.860mm (33.86mil)" at -2925.78,5206.5 h60
  text "PTH" at -1806.1,5206.5 h60
  text "Round" at -1300.23,5206.5 h60
  text "Top Layer - Bottom Layer" at -566.43,5206.5 h60
  text "Pad" at 933.12,5206.5 h60
  text "(Mixed)" at 1522.97,5206.5 h60
  text "(Mixed)" at 2268.77,5206.5 h60
  text "49" at -3505.62,5056.5 h60
  text "0.305mm (12.00mil)" at -2925.78,5056.5 h60
  text "PTH" at -1806.1,5056.5 h60
  text "Round" at -1300.23,5056.5 h60
  text "Top Layer - Bottom Layer" at -566.43,5056.5 h60
  text "Via" at 933.12,5056.5 h60
  text "Rounded" at 1522.97,5056.5 h60
  text "v61h30m0mx0" at 2268.77,5056.5 h60
  text "66" at -3505.62,4906.5 h60
  text "0.254mm (10.00mil)" at -2925.78,4906.5 h60
  text "PTH" at -1806.1,4906.5 h60
  text "Round" at -1300.23,4906.5 h60
  text "Top Layer - Bottom Layer" at -566.43,4906.5 h60
  text "Via" at 933.12,4906.5 h60
  text "Rounded" at 1522.97,4906.5 h60
  text "v51h25m0mx0" at 2268.77,4906.5 h60
  text "131 Total" at -3505.62,4756.5 h60
  text "'.Layer_Name'" at 16000,-9491 h150
DXF TOP:
  drawing of 18003 lines, arcs and shapes, not listed

## Dimensions
0,19.68 to 1437.01,59.05 on Dimensions
911.42,-88.58 to 1437.01,1515.75 on Dimensions

## Text inside footprints (layer, text, board x,y; h text height)
D1: Bottom Overlay "K" at 425,695 h40 r270; Bottom Component Outlines "K" at 356.34,647.47 h39.37 r270
D2: Bottom Overlay "K" at 527.49,519.25 h30
D3: Bottom Overlay "K" at 778.8,470 h28
D6: Top Overlay "K" at 280,180 h30
D8: Bottom Overlay "K" at 645,460 h30
D9: Bottom Overlay "K" at 930,465 h30
J3: Top Component Outlines "PCB EDGE" at 867.5,-107.5 h30 r180